# EAGLE board AugmentedStethoscope_vFinal (EAGLE 8.7.0)
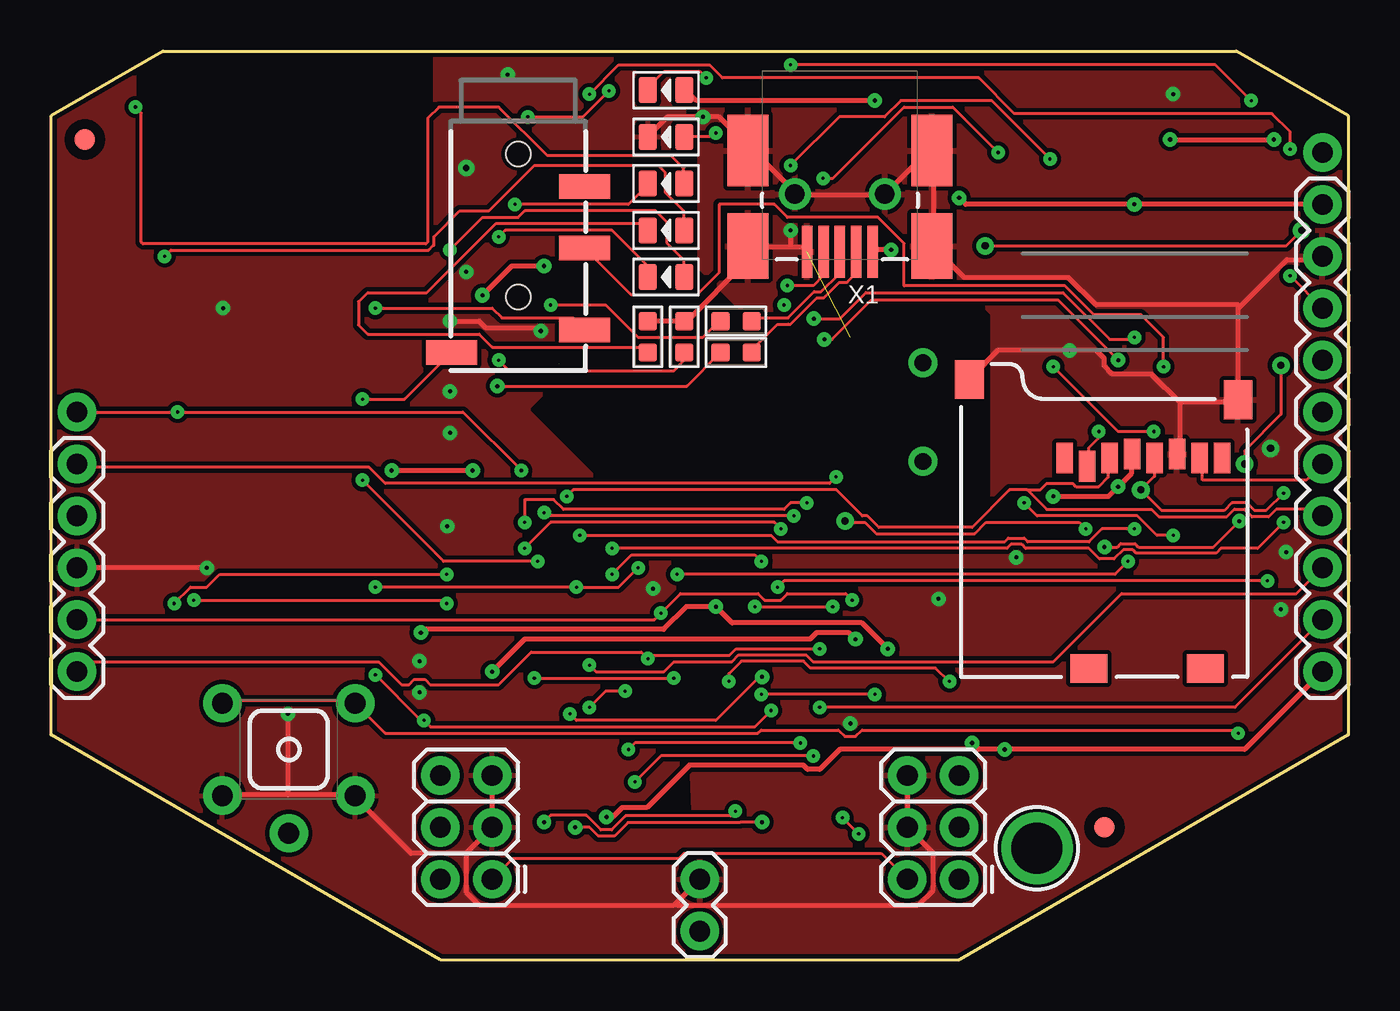
[diagram p0: board, top side]
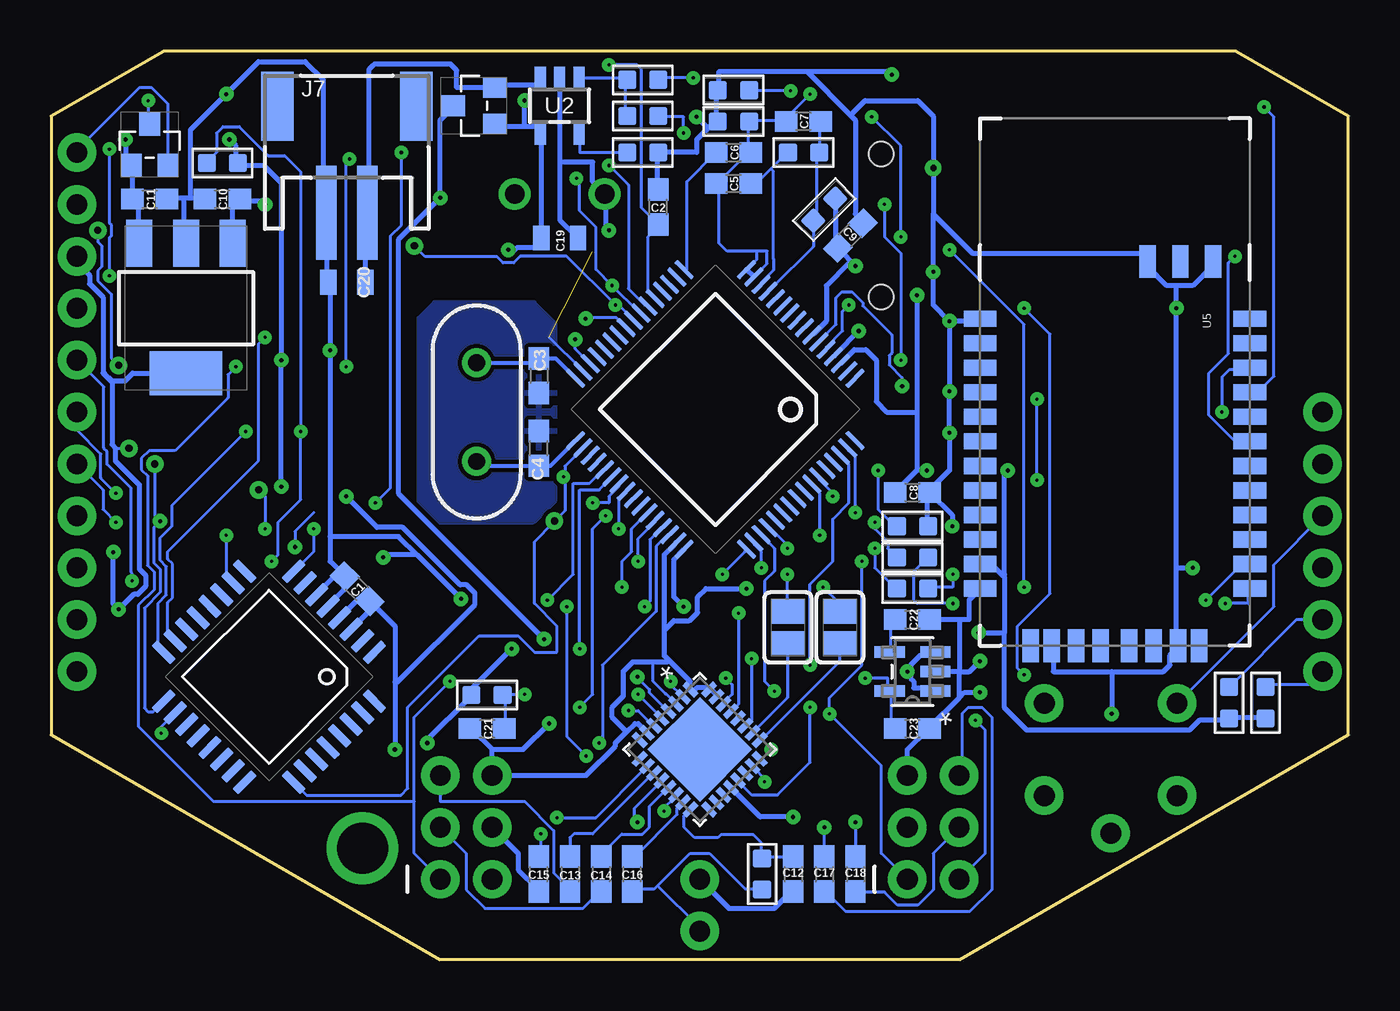
[diagram p1: board, bottom side, seen from below]

Size 63.5 x 44.45 mm. Coordinates in mm from the lower left corner, seen from the top.
Outline: 5.5,44.45 58,44.45 63.5,41.28 63.5,11 44.45,0 19.05,0 0,11 0,41.28 5.5,44.45
Copper layers (1*16): Top 0.035mm / dielectric 1.5mm / Bottom 0.035mm
Design rules "SparkFun *": minimum track width 6mil, minimum drill 6mil, track to track 6mil, track to pad 6mil, pad to pad 6mil, via to via 6mil, smd to smd 4mil, copper to edge 8mil, drill to drill 8mil, minimum pad ring 12mil, minimum via ring 10mil, stop-mask expansion 5mil, vias tented up to drill 25mil, thermal gap 8mil
Net classes: 0 default: width 0.152 mm, drill 0.152 mm, clearance 0.152 mm; 1 power: width 0.254 mm, drill 0.203 mm, clearance 0.203 mm
tRestrict: area 4.6,35.2 to 18.3,41.5
bRestrict: area 48.3,9.3 to 57.4,18.4; area 4.6,35.2 to 18.3,41.5; area 23.9,19.7 to 38.1,34.2; area 53.6,30.1 to 60.2,33.6

## Footprints (pad centres in the part's own frame; a part is rotated, then mirrored left to right if it is on the bottom)
0603 = smd 1.1 x 1: 1 -0.85,0; 2 0.85,0
0805 = smd 0.8 x 1.2: 1 -0.9,0; 2 0.9,0
FIDUCIAL_1MM = smd 1 x 1: 1 0,0
HC49US = drill 0.813: 1 -2.413,0; 2 2.413,0
1X05 = drill 1.016 pad 1.88: 1 0,0; 2 2.54,0; 3 5.08,0; 4 7.62,0; 5 10.16,0
2X3 = drill 1.016 pad 1.88: 1 0,0; 2 0,2.54; 3 2.54,0; 4 2.54,2.54; 5 5.08,0; 6 5.08,2.54
1X10 = drill 1.016 pad 1.88: 1 0,0; 2 2.54,0; 3 5.08,0; 4 7.62,0; 5 10.16,0; 6 12.7,0; 7 15.24,0; 8 17.78,0; 9 20.32,0; 10 22.86,0
1X02 = drill 1.016 pad 1.88: 1 0,0; 2 2.54,0
AUDIO_JACK_3.5MM_TRRS_SMD_RA = smd 1.2 x 2.5: EARTH 11.3,-3.25; RING1 6.2,3.25; RING2 3.2,3.25; TIP 10.2,3.25 | hole 1.2: 1.6,0; 8.6,0
JSTPH2 = smd 1 x 4.6: 1 -1,-3.7; 2 1,-3.7 | smd 1.6 x 3.4: NC1 -3.4,1.5; NC2 3.4,1.5
1X01NS = drill 1.016 pad 1.88: 1 0,0
LQFP32-08 = smd 1.3 x 0.4: 1 -4.493,2.8; 2 -4.493,2; 3 -4.493,1.2; 4 -4.493,0.4; 5 -4.493,-0.4; 6 -4.493,-1.2; 7 -4.493,-2; 8 -4.493,-2.8; 17 4.493,-2.8; 18 4.493,-2; 19 4.493,-1.2; 20 4.493,-0.4; 21 4.493,0.4; 22 4.493,1.2; 23 4.493,2; 24 4.493,2.8 | smd 0.4 x 1.3: 9 -2.8,-4.493; 10 -2,-4.493; 11 -1.2,-4.493; 12 -0.4,-4.493; 13 0.4,-4.493; 14 1.2,-4.493; 15 2,-4.493; 16 2.8,-4.493; 25 2.8,4.493; 26 2,4.493; 27 1.2,4.493; 28 0.4,4.493; 29 -0.4,4.493; 30 -1.2,4.493; 31 -2,4.493; 32 -2.8,4.493
LQFP64-05 = smd 1.2 x 0.25: 1 -5.915,3.759; 2 -5.915,3.251; 3 -5.915,2.743; 4 -5.915,2.261; 5 -5.915,1.753; 6 -5.915,1.245; 7 -5.915,0.762; 8 -5.915,0.254; 9 -5.915,-0.254; 10 -5.915,-0.762; 11 -5.915,-1.245; 12 -5.915,-1.753; 13 -5.915,-2.261; 14 -5.915,-2.743; 15 -5.915,-3.251; 16 -5.915,-3.759; 33 5.915,-3.759; 34 5.915,-3.251; 35 5.915,-2.743; 36 5.915,-2.261; 37 5.915,-1.753; 38 5.915,-1.245; 39 5.915,-0.762; 40 5.915,-0.254; 41 5.915,0.254; 42 5.915,0.762; 43 5.915,1.245; 44 5.915,1.753; 45 5.915,2.261; 46 5.915,2.743; 47 5.915,3.251; 48 5.915,3.759 | smd 0.25 x 1.2: 17 -3.759,-5.915; 18 -3.251,-5.915; 19 -2.743,-5.915; 20 -2.261,-5.915; 21 -1.753,-5.915; 22 -1.245,-5.915; 23 -0.762,-5.915; 24 -0.254,-5.915; 25 0.254,-5.915; 26 0.762,-5.915; 27 1.245,-5.915; 28 1.753,-5.915; 29 2.261,-5.915; 30 2.743,-5.915; 31 3.251,-5.915; 32 3.759,-5.915; 49 3.759,5.915; 50 3.251,5.915; 51 2.743,5.915; 52 2.261,5.915; 53 1.753,5.915; 54 1.245,5.915; 55 0.762,5.915; 56 0.254,5.915; 57 -0.254,5.915; 58 -0.762,5.915; 59 -1.245,5.915; 60 -1.753,5.915; 61 -2.261,5.915; 62 -2.743,5.915; 63 -3.251,5.915; 64 -3.759,5.915
LED-0805 = smd 0.889 x 1.27: + -0.889,0; - 0.889,0
R0603 = smd 0.889 x 0.889: 1 0,0.762; 2 0,-0.762
SOT-23 = smd 1.016 x 1.143: 1 -0.889,-1.016; 2 0.889,-1.016; 3 0,1.016
L0603 = smd 0.889 x 0.889: 1 -0.762,0; 2 0.762,0
ALPS_SKHH = drill 1.016 pad 1.88: 1 -3.251,2.261; 2 3.251,2.261; 3 -3.251,-2.261; 4 3.251,-2.261; 5 0,-4.1
SOLDERJUMPER = smd 1.168 x 1.6: 1 -0.762,0; 2 0.762,0
SOT-223 = smd 1.27 x 2.286: 1 -2.286,-3.175; 2 0,-3.175; 3 2.286,-3.175 | smd 3.556 x 2.159: PAD 0,3.175
MICRO-SD-SOCKET-PP = smd 0.8 x 1.5: 1 -8.94,10.7; 2 -7.84,10.3; 3 -6.74,10.7; 4 -5.64,10.9; 5 -4.54,10.7; 6 -3.44,10.9; 7 -2.34,10.7; 8 -1.24,10.7 | smd 1.8 x 1.4: CD1 -7.75,0.4; CD2 -2.05,0.4 | smd 1.4 x 1.9: GND1 -13.6,14.55; GND2 -0.45,13.55
SOT23-5 = smd 0.55 x 1.2: 1 -0.95,-1.3; 2 0,-1.3; 3 0.95,-1.3; 4 0.95,1.3; 5 -0.95,1.3
QFN32 = smd 0.305 x 0.813: 1 1.75,2.4; 2 1.25,2.4; 3 0.75,2.4; 4 0.25,2.4; 5 -0.25,2.4; 6 -0.75,2.4; 7 -1.25,2.4; 8 -1.75,2.4; 17 -1.75,-2.4; 18 -1.25,-2.4; 19 -0.75,-2.4; 20 -0.25,-2.4; 21 0.25,-2.4; 22 0.75,-2.4; 23 1.25,-2.4; 24 1.75,-2.4 | smd 0.813 x 0.305: 9 -2.4,1.75; 10 -2.4,1.25; 11 -2.4,0.75; 12 -2.4,0.25; 13 -2.4,-0.25; 14 -2.4,-0.75; 15 -2.4,-1.25; 16 -2.4,-1.75; 25 2.4,-1.75; 26 2.4,-1.25; 27 2.4,-0.75; 28 2.4,-0.25; 29 2.4,0.25; 30 2.4,0.75; 31 2.4,1.25; 32 2.4,1.75 | smd 3.607 x 3.607: HTAB 0,0
DBV5 = smd 1.473 x 0.559: 1 -1.118,0.95; 2 -1.118,0; 3 -1.118,-0.95; 4 1.118,-0.95; 5 1.118,0.95
RN41 = smd 0.8 x 1.6: 1 -6.6,-6.6; 2 -5.4,-6.6; 3 -4.2,-6.6; 4 -3,-6.6; 5 -1.8,-6.6; 6 -0.6,-6.6; 7 0.6,-6.6; 8 1.8,-6.6; 9 3,-6.6; 10 4.2,-6.6; 11 5.4,-6.6; 12 6.6,-6.6; 13 6.6,6.6; 14 5.4,6.6; 15 4.2,6.6; 16 3,6.6; 17 1.8,6.6; 18 0.6,6.6; 19 -0.6,6.6; 20 -1.8,6.6; 21 -3,6.6; 22 -4.2,6.6; 23 -5.4,6.6; 24 -6.6,6.6 | smd 1.6 x 0.8: 25 -9.4,4.8; 26 -9.4,3.2; 27 -9.4,1.6; 28 9.4,3.1; 29 9.4,-3.1; 30 9.4,-4.122; 31 9.4,-1.9; 32 9.4,-0.7; 33 9.4,0.7; 34 9.4,1.9; 35 9.4,4.122
MOUNTINGHOLE_2.5_PLATED = drill 2.5 pad 3.2: P$1 0,0
MOLEX_SD-67503-010 = smd 2.54 x 0.508: 1 2.819,1.6; 2 2.819,0.8; 3 2.819,0; 4 2.819,-0.8; 5 2.819,-1.6 | smd 3.5 x 2: P$1 -2.121,-4.5; P$2 -2.121,4.5 | smd 3.2 x 2: P$3 2.544,-4.5; P$4 2.544,4.5 | drill 0.95: P$5 0,2.2; P$6 0,-2.2

## Placement (x,y rotation side)
C1  0.1uF  [0603]  48.51,18.15 135 bottom
C2  0.1uF  [0603]  33.78,36.82 90 bottom
C3  22pF  [0603]  39.62,28.57 270 bottom
C4  22pF  [0603]  39.62,25.01 90 bottom
C5  0.1uF  [0603]  30.1,37.97 180 bottom
C6  0.1uF  [0603]  30.1,39.49 0 bottom
C7  2.2uF  [0603]  26.67,41.01 180 bottom
C8  0.1uF  [0603]  21.34,22.85 0 bottom
C9  0.1uF  [0603]  24.38,35.43 45 bottom
C10  0.1uF  [0603]  55.12,37.2 180 bottom
C11  2.2uF  [0603]  58.67,37.2 0 bottom
C12  2.2uF  [0603]  27.18,4.18 270 bottom
C13  2.2uF  [0603]  38.1,4.18 270 bottom
C14  2.2uF  [0603]  36.58,4.18 270 bottom
C15  0.15uF  [0603]  39.62,4.18 90 bottom
C16  0.1uF  [0603]  35.05,4.18 90 bottom
C17  2.2uF  [0603]  25.65,4.18 270 bottom
C18  2.2uF  [0603]  24.13,4.18 270 bottom
C19  10uF  [0805]  38.61,35.3 180 bottom
C20  10uF  [0805]  49.02,33.14 0 bottom
C21  2.2uF  [0603]  42.16,11.3 180 bottom
C22  2.2uF  [0603]  21.34,16.63 0 bottom
C23  2.2uF  [0603]  21.34,11.3 180 bottom
FID1  FIDUCIAL""  [FIDUCIAL_1MM]  1.65,40.12 0 top
FID2  FIDUCIAL""  [FIDUCIAL_1MM]  51.56,6.47 0 top
G1  16MHz  [HC49US]  42.67,26.79 270 bottom
J1  [1X05]  1.27,14.09 90 top
J2  FEMALE 2x3  [2X3]  21.59,3.93 90 top
J3  FEMALE 2x3  [2X3]  44.45,3.93 90 top
J4  [1X10]  62.23,14.09 90 top
J5  [1X02]  31.75,3.93 270 top
J6  AUDIO_JACK_TRRSSMD_RA  [AUDIO_JACK_3.5MM_TRRS_SMD_RA]  22.86,41.01 270 top
J7  JSTPH  [JSTPH2]  49.02,40.25 0 bottom
JP1  M01SMDNS  [1X01NS]  1.27,26.79 90 top
JP2  M01SMDNS  [1X01NS]  62.23,39.49 0 bottom
K1  MKL04Z32VLC4  [LQFP32-08]  52.83,13.84 225 bottom
K2  MK20DX256VLH7  [LQFP64-05]  30.99,26.92 225 bottom
P1  BLUE  [LED-0805]  30.1,33.39 180 top
P2  BLUE  [LED-0805]  30.1,37.97 180 top
P3  BLUE  [LED-0805]  30.1,35.68 180 top
P4  GREEN  [LED-0805]  30.1,40.25 180 top
P5  RED  [LED-0805]  30.1,42.54 180 top
R1  470  [R0603]  30.1,42.54 90 bottom
R2  470  [R0603]  30.99,30.47 0 top
R3  470  [R0603]  29.21,30.47 0 top
R4  10K  [R0603]  21.34,21.2 270 bottom
R5  [SOT-23]  58.67,39.87 0 bottom
R6  10K  [R0603]  21.34,19.68 90 bottom
R7  33  [R0603]  33.53,31.23 270 top
R8  33  [R0603]  33.53,29.71 270 top
R9  10K  [R0603]  21.34,18.15 90 bottom
R10  [L0603]  30.1,41.01 0 bottom
R11  470  [R0603]  26.67,39.49 270 bottom
R12  [L0603]  25.65,36.7 45 bottom
R13  2.2K  [R0603]  28.7,4.18 180 bottom
R14  10K  [R0603]  55.12,38.98 90 bottom
R15  470  [R0603]  34.54,41.27 270 bottom
R16  2.2K  [R0603]  34.54,39.49 270 bottom
R17  470  [R0603]  34.54,43.05 270 bottom
R18  [SOT-23]  42.8,41.78 90 bottom
R19  10K  [R0603]  4.06,12.57 0 bottom
R20  [L0603]  42.16,12.95 180 bottom
R21  10K  [R0603]  5.84,12.57 0 bottom
S1  [ALPS_SKHH]  11.63,10.28 0 top
SJ1  [SOLDERJUMPER]  27.43,16.25 90 bottom
SJ2  [SOLDERJUMPER]  24.89,16.25 90 bottom
T1  MCP1825S  [SOT-223]  56.9,31.87 180 bottom
U1  microSD  [MICRO-SD-SOCKET-PP]  58.55,13.84 0 top
U2  MCP73831T-2ACI/OT  [SOT23-5]  38.61,41.78 180 bottom
U3  SGTL5000XNAA3R2  [QFN32]  31.75,10.28 45 bottom
U4  TPS79318DBVR  [DBV5]  21.34,14.09 180 bottom
U5  BLUETOOTH-RN41  [RN41]  11.43,24.76 270 bottom
U$1  MOUNTINGHOLE2.5  [MOUNTINGHOLE_2.5_PLATED]  48.26,5.45 0 top
X1  MINI-USB  [MOLEX_SD-67503-010]  38.61,37.46 270 top

## Library data of the parts
C1 C2 C5 C6 C8-C10 C15 C16 = SparkFun-Capacitors; PROD_ID: CAP-08604
C3 C4 = SparkFun-Capacitors; PROD_ID: CAP-07876
C7 C11-C14 C17 C18 C21-C23 = SparkFun-Capacitors; PROD_ID: CAP-07888
C19 C20 = SparkFun-Capacitors; PROD_ID: CAP-11330
FID1 FID2 U$1 = microbuilder; BOM: EXCLUDE
G1 = t32_ref; DESC: 16MHz / 18pF / 10ppm; MF: ABRACON; MPN: ABL-16.000MHz-B1U; OC_MOUSER: 815-ABL-16-B1U; PACKAGE: HC-49US; TYPE: Crystal
J1 J5 = SparkFun-Connectors
J2 J3 = SparkFun-Connectors; PROD_ID: CONN-11566
J4 = SparkFun-Connectors; PROD_ID: CONN-11563
J6 = SparkFun-Connectors; PROD_ID: CONN-10676; SF_ID: PRT-12639
J7 U2 = microbuilder
JP1 JP2 U1 = SparkFun
K1 = t32_ref; DESC: MKL04Z32VLC4 (preprogrammed); MF: PJRC; MPN: IC_MKL04Z32_TQFP32; PACKAGE: LQFP-32; TYPE: Microcontroller
K2 = t32_ref; DESC: MK20DX256VLH7; MF: NXP; MPN: MK20DX256VLH7; OC_MOUSER: 841-MK20DX256VLH7; PACKAGE: LQFP-64; TYPE: Microcontroller
P1-P5 = t32_ref; DESC: orange; MF: ROHM Semiconductor; MPN: SML-211DTT86; OC_MOUSER: 755-SML-211DTT86; PACKAGE: 0805; TYPE: LED
R1-R4 R11 R13 R14 R16 R19 R21 = t32_ref; DESC: 470R / 1 % / 0.1 W; MF: Vishay; MPN: CRCW0603470RFKEA; OC_MOUSER: 71-CRCW0603-470-E3; PACKAGE: 0603; TYPE: Resistor
R5 R18 = t32_ref; DESC: Dual Schottky, common cat; MF: NXP Semiconductors; MPN: BAT54C,215; OC_MOUSER: 771-BAT54C-T/R; PACKAGE: SOT-23; TYPE: Diode
R6-R9 R15 R17 = t32_ref; DESC: 33R / 1% / 0.25 W; MF: Panasonic; MPN: ERJ-PA3F33R0V; OC_MOUSER: 667-ERJ-PA3F33R0V; PACKAGE: 0603; TYPE: Resistor
R10 R12 R20 = t32_ref; DESC: 600R / 100MHz; MF: Murata Electronics; MPN: BLM18AG601SN1D; OC_MOUSER: 81-BLM11A601S; PACKAGE: 0603; TYPE: Ferrite
S1 = t32_ref; DESC: SPST; MF: ALPS; MPN: SKHHPKA010; OC_MOUSER: 688-SKHHPK; PACKAGE: 6x6x5 MM; TYPE: Tactile switch
SJ1 SJ2 = t32_ref
T1 = t32_ref; DESC: 3.3V 500mA; MF: Microchip Technology; MPN: MCP1825S-3302E/DB; OC_MOUSER: 579-MCP1825S-3302EDB; PACKAGE: SOT-223-3; TYPE: Voltage regulator
U3 = pd3d_augmentedstethoscope; MANUFACTURER_PART_NUMBER: SGTL5000XNAA3R2; VENDOR: Freescale
U4 = pd3d_augmentedstethoscope; MANUFACTURER_PART_NUMBER: TPS79318DBVR; VENDOR: Texas Instruments
U5 = ScratchPad
X1 = t32_ref; DESC: MINI USB; MF: MOLEX; MPN: 0675031020; OC_MOUSER: 538-67503-1020; TYPE: Mini USB

## Nets
0/RX1: K2.39 R6.1
1/TX1: K2.40 R9.1
2: K2.57
3.3V [power]: C1.1 C8.1 C9.1 C11.1 J4.1 K1.3 K1.4 K2.3 K2.7 K2.30 K2.48 R5.1 R12.2 R14.2 R19.2 R20.2 R21.2 T1.3 U1.4 U3.20 U5.11
3/PWM: K2.28
4/PWM: K2.29
5/PWM: K2.64
6/PWM: K2.61
7/SPI_MOSI: J4.4 K2.59 U1.3
8: K2.60
9: K2.46 U3.24
10/SPI_CS: K2.49 R14.1 U1.2
11: K2.51 U3.21
12/SPI_MISO: J4.5 K2.52 U1.7
13/LED: K2.50 P1.+ SJ2.2
14/SPI_SCK: J4.6 K2.58 U1.5
15/A1: J4.7 K2.43
16/A2: K2.35
17/A3: K2.36
18/A4/SDA: J1.1 K2.38 R19.1 U3.27
19/A5/SCL: J1.2 K2.37 R21.1 U3.29
20/A6/SPI_CS: J4.3 K2.62
21/A7/SPI_CS: J4.2 K2.63
22/A8: K2.44 SJ1.2
23/A9: K2.45 U3.23
24: K2.27
25/PWM: K2.42
26/A15: K2.2
27/A16: K2.54
28/A17: K2.53
29/A18: K2.55
30/A19: K2.56
31/A20: K2.1
32/TOUCH: K2.41
33/TOUCH: K2.26
A12: K2.11
A13: K2.12
AGND: C5.2 C6.2 C7.2 J4.8 K2.15 K2.16 R10.2
D3: P2.- R2.2
D4: P3.- R3.2
D+: R7.1 X1.3
D-: R8.1 X1.2
DAC/A14: K2.18
DETECT: U1.CD2
GND [power]: C1.2 C2.2 C3.2 C4.2 C8.2 C9.2 C10.2 C11.2 C12.2 C15.1 C19.1 C20.1 C21.2 C22.2 C23.1 J1.3 J2.3 J2.5 J3.4 J3.6 J4.9 J5.1 J7.1 K1.5 K1.6 K2.4 K2.31 K2.47 P4.- R1.1 R2.1 R3.1 R4.1 R10.1 R16.1 S1.3 S1.4 T1.2 T1.PAD U1.6 U1.GND1 U1.GND2 U2.2 U3.1 U3.3 U3.7 U3.31 U3.32 U4.2 U5.1 U5.12 U5.25 U5.27 U5.28 U5.29 X1.5 X1.P$1 X1.P$2 X1.P$3 X1.P$4 X1.P$5 X1.P$6
HPGND: J2.1 J3.2 J6.EARTH U3.4
HPL: J2.2 J6.TIP U3.6
HPR: J3.1 J6.RING1 U3.2
ID: K1.10 K2.23 X1.4
LIL: C18.2 J2.4
LIL_ISO: C18.1 U3.14
LIR: C14.2 J3.3
LIR_ISO: C14.1 U3.13
LOL: C17.2 J2.6
LOL_ISO: C17.1 U3.12
LOR: C13.2 J3.5
LOR_ISO: C13.1 U3.11
MIC: C16.1 J5.2 R13.1
MIC_BIAS: C12.1 R13.2 U3.16
N$1: C20.2 J7.2 R18.2 U2.3
N$2: K1.16 K2.22
N$3: K1.17 K2.24
N$4: C15.2 U3.10
N$5: C3.1 G1.1 K2.32
N$6: C4.1 G1.2 K2.33
N$7: C5.1 K2.14 R11.2
N$8: C22.1 U4.4
N$9: SJ1.1 U3.26
N$10: K2.5 R7.2
N$11: C6.1 K2.17
N$12: C23.2 U3.30 U4.5
N$13: SJ2.1 U3.25
N$14: K2.6 R8.2
N$15: C16.2 U3.15
N$16: P3.+ U5.19
N$17: C7.1 K2.13 R11.1 R12.1
N$52: P1.- R1.2
N$68: C2.1 K2.21 R5.3
N$70: K1.15 K2.25
N$71: P5.- R17.1
N$72: R15.2 R17.2 U2.1
N$73: P2.+ U5.21
N$75: R16.2 U2.5
N$76: P4.+ R15.1
N$79: C21.1 R20.1 U3.5
PIO4: JP1.1 R4.2 U5.22
PROG: J1.4 K1.18 S1.1 S1.2
RESET: J1.5 K1.8 K1.25 K2.34
SMIRF_CTS: U5.16
SMIRF_RTS: U5.15
SMIRF_RX: R9.2 U5.13
SMIRF_TX: R6.2 U5.14
V_USB [power]: C19.2 P5.+ R18.1 U2.4 X1.1
VIN [power]: C10.1 J4.10 R18.3 T1.1 U4.1 U4.3
VRTC: JP2.1 R5.2

## Tracks (layer width: path | path; a pad name or v marks a point on that pad's centre or on a via)
0/RX1  (via drill 0.15)
  Top 0.152: v23.18,21.39 23.18,22.5 24.61,22.5 25.08,22.03 35.88,22.03 36.2,22.34 v36.99,22.34
  Bottom 0.152: R6.1 22.54,20.12 22.54,20.44 23.18,21.07 v23.18,21.39 | v36.99,22.34 36.2,22.34 36.2,22.66 35.72,23.14 K2.39
1/TX1  (via drill 0.15)
  Top 0.152: v23.18,20.12 24.45,21.39 35.4,21.39 v35.72,21.07
  Bottom 0.152: v23.18,20.12 23.18,19.17 22.23,18.22 R9.1 | v35.72,21.07 35.72,22.5 35.4,22.82 K2.40
3.3V  (via drill 0.2)  (1 unrouted)
  Top 0.152: v52.23,29.33 49.28,32.28 40.16,32.28 38.23,30.35 v37.85,30.35
  Top 0.254: v21.11,32.5 22.54,33.93 v24.13,33.93 | v16.67,23.93 v20.64,23.93 | U1.4 52.86,24.73 52.86,23.77 v52.23,23.14 51.75,22.66 v49.05,22.66 | v54.77,40.12 v59.85,40.12 | v45.09,10.6 45.4,10.28 v46.67,10.28 | v46.67,10.28 58.42,10.28 J4.1 | v40.96,15.2 39.69,16.47 33.34,16.47 v32.54,17.26 31.1,17.26 29.98,16.15 18.26,16.15 v18.1,15.99 | v46.67,10.28 38.61,10.28 37.63,9.3 37.03,9.3 36.82,9.52 31.24,9.52 29.16,7.43 27.96,7.43 27.5,6.98 v27.18,6.98
  Bottom 0.152: K2.30 37.85,29.9 v37.85,30.35
  Bottom 0.254: R12.2 25.08,37.11 25.08,34.89 C9.1 24.92,34.73 v24.13,33.93 24.45,34.09 25.56,32.98 25.56,31.23 26.19,30.6 K2.7 | 21.11,23.93 22.07,22.98 C8.1 | v21.11,32.5 21.11,26.79 | 21.11,26.79 21.11,23.93 | R19.2 4.13,11.87 5.71,11.87 R21.2 5.87,11.71 7.3,11.71 7.78,11.23 15.75,11.23 16.83,12.31 16.83,15.99 | 16.83,15.99 16.83,18.69 16.91,18.77 | 16.91,18.77 17.46,19.33 17.94,19.33 U5.11 | v20.64,23.93 21.11,23.93 | v16.67,23.93 16.83,23.77 16.83,18.85 16.91,18.77 | T1.3 59.21,35.04 59.21,36.95 59.37,37.11 C11.1 59.53,37.27 59.53,38.85 R5.1 59.69,38.85 59.85,39.01 v59.85,40.12 | v52.23,23.14 v52.23,29.33 52.23,38 53.09,38.85 54.29,38.85 R14.2 54.45,39.01 54.45,39.81 v54.77,40.12 | 47.94,17.42 47.93,17.49 | 47.93,17.49 C1.1 | 48.74,16.31 K1.3 47.93,17.04 47.93,17.49 | v45.09,10.6 45.09,10.76 43.02,12.82 R20.2 42.86,12.98 42.86,13.3 v40.96,15.2 | 47.94,21.55 v49.05,22.66 47.54,21.15 46.29,21.15 43.47,18.33 43.15,18.33 42.75,17.93 42.75,17.36 46.53,13.58 46.67,13.58 | C1.1 47.94,17.58 47.94,17.65 48.46,17.65 K1.4 | v18.1,15.99 16.83,15.99 | v27.18,6.98 28.8,6.98 U3.20 | 21.11,26.79 22.61,26.79 23.11,27.3 23.11,29.33 23.62,29.84 24.19,29.84 K2.3 | C1.1 46.67,16.31 46.67,13.58 | 46.67,13.58 v46.67,10.28 | K2.48 33.02,19.57 33.02,17.74 v32.54,17.26
7/SPI_MOSI  (via drill 0.15)
  Top 0.152: v25.24,22.66 25.56,22.98 38.43,22.98 39.7,21.71 39.95,21.71 40.51,21.15 45.08,21.15 46.91,22.98 47.78,22.98 | U1.3 51.75,24.41 51.75,23.61 51.28,23.14 50.16,23.14 50.01,23.3 48.74,23.3 48.42,22.98 47.78,22.98 | 47.78,22.98 48.74,22.03 53.86,22.03 54.23,21.66 57.55,21.66 57.92,22.04 58.41,22.04 58.79,21.66 59.59,21.66 59.97,22.04 61.9,22.04 J4.4
  Bottom 0.152: v25.24,22.66 25.24,22.82 25.88,23.46 K2.59
9  (via drill 0.15)
  Top 0.152: v28.26,10.28 28.57,10.6 v36.67,10.6
  Bottom 0.152: v28.26,10.28 28.73,9.8 U3.24 | v36.67,10.6 36.51,10.76 36.51,14.41 33.88,17.04 33.88,20.21 33.34,20.76 K2.46
10/SPI_CS  (via drill 0.15)
  Top 0.152: v51.28,25.84 51.28,25.52 50.8,25.04 50.8,24.25 U1.2 | v30.64,18.85 52.07,18.85 v52.7,19.49
  Bottom 0.152: R14.1 55.88,39.01 55.4,39.49 55.4,40.44 55.09,40.76 54.29,40.76 52.86,39.33 52.07,39.33 51.28,38.54 v51.28,25.84 51.28,22.5 52.39,21.39 52.39,19.8 v52.7,19.49 | v30.64,18.85 29.53,19.96 K2.49
11  (via drill 0.15)
  Top 0.152: v26.35,12.34 27.15,13.14 v28.1,13.14
  Bottom 0.152: v28.1,13.14 28.57,13.61 28.57,18.53 28.1,19.01 28.1,20.12 28.73,20.76 K2.51 | U3.21 29.84,8.69 29.21,8.06 27.94,8.06 26.35,9.64 v26.35,12.34
12/SPI_MISO  (via drill 0.15)
  Top 0.152: v60.33,21.39 59.05,20.12 57.26,20.12 57.02,19.88 53.1,19.88 52.94,20.05 52.47,20.05 52.03,19.6 51.32,19.6 50.8,20.12 47.7,20.12 47.51,20.31 46.98,20.31 46.79,20.12 v27.46,20.12 | J4.5 61.44,23.46 56.36,23.46 56.36,24.41 U1.7
  Bottom 0.152: v27.46,20.12 27.46,20.28 28.26,21.07 K2.52 | v60.33,21.39 60.96,22.03 60.96,22.98 J4.5
13/LED  (via drill 0.15)
  Top 0.152: v28.73,19.17 27.78,18.22 v25.72,18.22 v15.88,18.22 | v19.53,34.73 21.11,36.31 22.86,36.31 23.18,36.63 29.59,36.63 30.13,36.1 30.13,35.08 30.96,34.25 30.96,33.46 P1.+
  Bottom 0.152: v28.73,19.17 28.73,19.96 29.05,20.28 K2.50 | v25.72,18.22 24.92,17.42 24.92,17.11 SJ2.2 | v19.53,34.73 15.88,31.08 v15.88,18.22
14/SPI_SCK  (via drill 0.15, 0.35)
  Top 0.152: v25.88,20.76 35.24,20.76 35.56,20.44 46.68,20.44 46.86,20.62 47.63,20.62 47.81,20.44 50.8,20.44 51.44,21.07 v53.02,21.07 | U1.5 54.01,23.65 v53.34,22.98 54.36,21.96 57.42,21.96 57.8,22.34 58.53,22.34 58.91,21.96 59.47,21.96 v60.33,22.82
  Bottom 0.152: v25.88,20.76 25.88,22.82 26.19,23.14 K2.58 | v60.33,22.82 61.06,23.56 61.06,24.73 62.23,25.9 J4.6 | v53.34,22.98 53.02,22.66 v53.02,21.07
15/A1  (via drill 0.15)
  Top 0.152: v35.56,18.22 35.88,18.53 v59.53,18.53
  Bottom 0.152: v35.56,18.22 35.56,19.49 35.08,19.96 35.08,21.07 34.45,21.71 K2.43 | v59.53,18.53 59.53,18.89 59.59,18.95 59.59,23.07 60.76,24.23 60.76,24.86 60.92,25.02 60.92,28.02 J4.7
18/A4/SDA  (via drill 0.15)
  Top 0.152: 29.05,14.88 28.89,15.04 23.49,15.04 21.91,13.45 18.55,13.45 18.3,13.71 17.77,13.71 17.52,13.45 17.14,13.45 16.03,14.57 1.75,14.57 J1.1 | 29.05,14.88 v29.21,14.72 | v37.62,15.2 37.09,15.2 37.08,15.21 33.53,15.21 33.2,14.88 29.05,14.88
  Bottom 0.152: v29.21,14.72 29.21,11.71 29.37,11.55 U3.27 | J1.1 1.27,13.45 3.97,13.45 R19.1 | v37.62,15.2 37.62,22.98 36.67,22.98 36.2,23.46 K2.38
19/A5/SCL  (via drill 0.15)
  Top 0.152: J1.2 29.53,16.63 v29.84,16.95 30.8,17.9 34.61,17.9 34.92,17.58 35.72,17.58 36.04,17.9 38.89,17.9 v39.21,17.58
  Bottom 0.152: v29.84,16.95 29.84,12.5 30.16,12.18 U3.29 | R21.1 2.54,16.63 J1.2 | v39.21,17.58 37.94,18.85 37.94,23.3 37.15,23.3 36.51,23.93 K2.37
20/A6/SPI_CS  (via drill 0.15)
  Top 0.152: v26.35,14.41 26.67,14.09 30,14.09 30.48,14.57 33.32,14.57 33.65,14.9 36.96,14.9 37.29,14.57 49.05,14.57 52.39,17.9 60.96,17.9 J4.3
  Bottom 0.152: v26.35,14.41 26.35,18.38 25.24,19.49 25.24,21.55 24.45,22.34 24.45,24.25 24.77,24.57 K2.62
21/A7/SPI_CS  (via drill 0.15)
  Top 0.152: v24.13,21.87 24.29,21.71 v36.35,21.71 | v37.62,12.34 57.94,12.34 J4.2
  Bottom 0.152: v24.13,21.87 24.13,24.57 24.45,24.88 K2.63 | v36.35,21.71 36.99,21.07 36.99,12.98 v37.62,12.34
22/A8  (via drill 0.15)
  Top 0.152: v34.77,19.49 34.45,19.8 28.42,19.8 v27.46,18.85
  Bottom 0.152: v34.77,19.49 34.77,20.6 33.97,21.39 K2.44 | v27.46,18.85 27.46,17.11 SJ1.2
23/A9  (via drill 0.15)
  Top 0.152: v28.57,8.69 29.84,9.96 v37.31,9.96 | v34.45,17.26 v38.26,17.26
  Bottom 0.152: v28.57,8.69 28.57,8.85 29.05,9.33 U3.23 | v37.31,9.96 38.26,10.91 v38.26,17.26 | K2.45 33.66,21.07 34.19,20.54 34.19,17.52 v34.45,17.26
AGND  (via drill 0.15)
  Top 0.152: v60.64,33.46 J4.8 | v26.35,42.35 27.78,43.78 32.23,43.78 32.86,43.14 45.4,43.14 47.15,41.39 59.75,41.39 60.64,40.51 v60.64,39.65
  Bottom 0.152: 29.37,33.77 K2.16 28.96,34.26 28.96,34.66 | 29.37,39.49 29.37,40.92 R10.2 29.21,41.08 27.62,41.08 C7.2 27.46,41.08 27.46,41.24 v26.35,42.35 | 29.37,39.49 30.8,38.06 C5.2 30.8,37.9 30.8,35.04 30.42,34.66 28.96,34.66 | 29.37,39.49 C6.2 | K2.15 28.45,34.05 28.45,34.66 28.96,34.66 | v60.64,39.65 60.64,36.04 60.56,35.95 60.56,35.41 60.64,35.32 v60.64,33.46
  Bottom 0.254: K2.15 K2.16 | K2.16
D3  (via drill 0.15)
  Top 0.152: v22.7,36.95 28.26,36.95 29.21,37.9 P2.- | v21.91,29.33 22.41,28.82 30.48,28.82 30.99,29.33 R2.2
  Bottom 0.152: v21.91,29.33 21.91,34.57 22.7,35.36 v22.7,36.95
D4
  Top 0.152: P3.- 28.89,36 21.75,36 18.38,32.63 15.49,32.63 15.05,32.19 15.05,31.04 15.49,30.6 20.95,30.6 21.59,29.96 29.05,29.96 29.21,29.81 R3.2
D+
  Top 0.152: R7.1 34.45,31.39 36.07,31.39 37.35,32.68 37.69,32.68 38.58,33.56 38.58,34.57 X1.3
D-
  Top 0.152: R8.1 34.29,29.81 35.56,31.08 36.07,31.08 36.08,31.09 36.19,31.09 37.48,32.37 37.82,32.37 38.59,33.14 38.96,33.14 39.37,33.55 39.37,34.57 X1.2
GND  (via drill 0.2, 0.3, 0.35)  (1 unrouted)
  Top 0.254: R3.1 R2.1 31.11,31.23 33.97,34.09 33.97,34.89 X1.P$3 34.13,34.89 36.2,34.89 | 36.2,34.89 36.83,34.89 36.99,34.73 X1.5 | P4.- 29.21,40.28 30.16,41.24 v31.91,41.24 32.7,41.24 33.97,39.97 33.97,39.65 X1.P$1 34.13,39.49 34.45,39.49 36.35,37.58 X1.P$6 36.51,37.43 40.8,37.43 X1.P$5 40.96,37.58 42.86,39.49 43.02,39.49 X1.P$2 43.18,39.49 43.18,35.04 X1.P$4 43.18,34.89 44.7,33.37 49.8,33.37 51.14,32.03 58.1,32.03 58.18,31.95 | v36.2,35.68 36.2,34.89 | 55.25,27.27 55.25,24.88 U1.6 | 55.25,27.27 57.94,27.27 U1.GND2 58.1,27.42 58.1,31.87 58.18,31.95 | U1.GND1 45.09,28.54 46.36,29.81 v49.85,29.81 51.14,29.81 51.55,29.4 51.55,29.05 51.95,28.65 53.86,28.65 55.25,27.27 | J4.9 62.07,34.25 60.48,34.25 58.18,31.95 | J3.6 J3.4 43.18,5.2 43.18,3.4 42.44,2.66 30.64,2.66 30.56,2.74 | 11.59,8.06 14.76,8.06 S1.4 14.92,7.9 17.62,5.2 20.32,5.2 | 11.59,8.06 8.41,8.06 S1.3 | J2.5 J2.3 20.32,5.2 | 30.56,2.74 30.48,2.66 20.95,2.66 20.32,3.29 20.32,5.2 | 30.56,2.74 J5.1 | v7.62,19.17 J1.3 | v23.97,30.76 23.81,30.92 21.27,30.92 20.95,31.23 v19.53,31.23 | v11.59,12.03 11.59,8.06
  Bottom 0.152: U3.3 33.41,13 33.43,13 34.04,13.61 34.04,14.57 | K2.31 39.12,30.45 | 39.12,30.45 | 60.35,25.03 59.71,25.03 v59.69,25.01
  Bottom 0.254: 56.99,37.27 57.78,37.27 C11.2 | 56.99,37.27 56.67,37.27 | 56.67,37.27 56.04,37.27 C10.2 | 56.99,37.27 56.99,35.04 T1.2 | 49.85,17.42 K1.5 49.15,18.08 49.15,18.79 | 49.15,18.79 49.85,19.49 49.85,20.69 | 49.15,18.79 C1.2 49.61,18.75 K1.6 | 49.85,20.69 v49.85,29.81 49.85,33.14 C20.1 50.01,33.14 50.01,36.47 J7.1 50.16,36.63 50.16,43.05 51.05,43.93 53.34,43.93 v54.93,42.35 56.67,40.6 56.67,37.27 | 37.78,35.2 C19.1 37.78,35.36 38.58,36.16 38.58,39.01 | 38.58,39.01 38.58,42.98 U2.2 | v36.2,35.68 36.35,35.84 36.35,37.43 X1.P$6 36.51,37.58 36.99,38.06 36.99,39.01 38.58,39.01 | J4.9 62.23,34.09 61.62,33.48 61.62,33.06 60.96,32.4 60.96,28.69 | J3.4 40.64,5.2 40.64,4.41 39.69,3.45 C15.1 | 31.27,13.3 30.96,12.98 U3.31 | 31.27,13.3 31.91,13.3 32.07,13.14 U3.1 32.23,13.3 32.23,13.61 33.26,14.65 | 31.27,13.3 U3.32 | K2.47 33.02,20.28 33.48,19.82 33.48,16.12 | 35.32,11.15 35.88,10.6 35.88,10.44 37.31,9.01 J3.6 41.91,10.28 | 35.32,11.15 34.92,11.55 34.77,11.55 34.45,11.23 U3.7 | 41.91,10.28 42.86,11.23 C21.2 | 35.32,11.15 36.04,11.87 36.04,12.34 35.48,12.9 35.48,14.12 35.05,14.55 35.05,14.57 34.04,14.57 33.34,14.57 33.26,14.65 | C12.2 27.3,3.29 28.1,2.5 30.32,2.5 J5.1 | 19.05,16.63 18.57,16.63 18.57,17.58 18.1,18.06 U5.12 | 19.05,16.63 C22.2 | 19.05,14.09 U4.2 | 19.05,16.63 19.05,14.09 | J2.5 21.59,10.28 20.64,11.23 C23.1 20.48,11.39 19.05,12.82 | 19.05,12.82 19.05,14.09 | 8.41,32.98 8.89,32.98 9.83,33.92 U5.27 9.84,34.25 10.16,34.57 18.41,34.57 20.32,36.47 | 8.41,32.98 7.62,32.98 6.63,33.97 U5.25 | 11.59,14.09 14.45,14.09 14.45,15.2 U5.29 | 11.59,14.09 9.05,14.09 8.73,14.41 8.73,14.88 8.41,15.2 U5.28 8.41,15.36 8.41,19.17
  Bottom 0.254: 8.41,19.17 v8.41,31.87 8.41,32.98 | 8.41,19.17 v7.62,19.17 | C2.2 33.81,37.74 33.81,39.49 R16.1 31.91,39.49 31.91,40.12 31.35,40.68 | 30.96,41.08 30.96,42.51 R1.1 30.8,42.66 30.8,43.46 26.51,43.46 | 26.51,43.46 24.37,41.32 | 24.37,41.32 24.13,41.08 24.13,36.47 23.81,36.16 C9.2 | 30.96,41.08 31.35,40.68 | 30.96,41.08 R10.1 | R4.1 20.64,21.23 20.64,22.82 C8.2 | v23.97,30.76 25.08,29.65 K2.4 | v19.53,31.23 18.1,31.23 U5.1 | C8.2 20.48,22.98 19.53,23.93 v19.53,25.77 v19.53,27.81 v19.53,31.23 | 24.37,41.32 23.65,42.03 21.08,42.03 20.32,41.27 v20.32,38.73 20.32,36.47 | 20.32,36.47 v20.32,33.65 20.32,32.03 v19.53,31.23 | 11.59,14.09 v11.59,12.03 | 31.35,40.68 v31.91,41.24 | 19.05,14.09 18.54,14.09 v18.03,14.6 | 19.05,12.82 18.8,13.07 v18.03,13.07 | 41.91,10.28 40.39,10.28 v39.12,11.55 | C8.2 19.39,21.75 v19.39,21.2 | 49.85,20.69 46.48,20.69 45.59,19.8 | 45.59,19.8 v43.43,17.65 | 45.59,19.8 47.12,19.8 v47.24,19.68 | 60.96,28.69 60.52,28.25 60.52,25.19 60.35,25.03 60.35,24.4 59.18,23.23 59.18,19.12 58.87,18.81 58.87,18.26 59.26,17.87 59.46,17.87 v60.2,17.14 60.45,17.39 v60.45,19.93 | 33.48,16.12 33.48,14.86 33.26,14.65 | v29.46,18.15 31.45,18.15 31.86,17.74 31.86,16.98 32.26,16.58 33.02,16.58 33.48,16.12 | 26.51,43.46 22.51,43.46 v22.35,43.3 | 60.96,28.69 60.89,28.69 60.51,28.32 59.88,28.32 59.5,28.69 T1.PAD
  pour Bottom: 38.86,31.11 39.88,32.12 44.7,32.12 45.47,31.36 45.47,22.22 44.7,21.46 39.88,21.46 38.86,22.47
  pour Top: 18.8,44.32 18.8,34.79 4.06,34.79 4.06,43.68 0,41.27 0,11.04 19.05,-0.01 31.75,-0.01 31.75,18.41 30.99,19.17 23.37,26.79 23.37,27.04 30.99,34.66 30.99,44.44 18.8,44.44
  pour Top: 31.75,0.12 44.45,0.12 63.37,11.04 63.37,41.27 58.04,44.32 31.75,44.44 31.75,33.9 36.58,29.08 38.48,30.98 38.48,31.62 39.88,33.01 44.7,33.01 46.1,31.62 46.1,22.22 44.83,20.95 39.62,20.95 38.35,22.22 38.35,24.12 37.21,25.27 30.99,19.17
HPGND  (via drill 0.15, 0.2)
  Top 0.152: v25.4,12.03 25.72,11.71 32.54,11.71 34.67,13.84 v34.8,13.84 | v15.24,27.42 17.3,27.42 19.53,29.65 J6.EARTH | v15.24,23.46 19.21,19.49 v23.81,19.49 | J3.2 40.64,5.2 30.99,5.2 30.72,4.93 22.62,4.93 22.61,4.95 J2.1
  Bottom 0.152: J2.1 22.86,5.2 22.86,9.49 v25.4,12.03 25.4,12.82 23.81,14.41 v23.81,19.49 | U3.4 33.34,12.18 34.21,13.05 34.21,13.21 34.8,13.8 v34.8,13.84 | v15.24,23.46 v15.24,27.42
HPL  (via drill 0.15)
  Top 0.152: v35.24,12.18 34.45,11.39 18.57,11.39 v18.26,11.71 18.1,11.71 v15.88,13.93 | v15.88,31.87 21.59,31.87 22.07,31.39 25.56,31.39 26.04,30.92 J6.TIP
  Bottom 0.152: v35.24,12.18 34.77,12.18 34.13,11.55 U3.6 | v18.26,11.71 17.78,11.23 17.78,5.2 J2.2 | v15.88,31.87 14.61,30.6 14.61,17.9 16.19,16.31 16.19,14.25 v15.88,13.93
HPR  (via drill 0.15)
  Top 0.152: v43.97,13.61 43.94,13.61 43.29,14.26 37.17,14.26 36.83,14.6 33.78,14.6 33.18,13.99 v33.18,13.61 | v54.45,29.01 54.45,30.44 53.34,31.55 51.04,31.55 49.63,32.96 41.75,32.96 41.75,35.04 40.48,36.31 36.04,36.31 35.4,36.95 32.7,36.95 32.7,33.62 31.59,32.5 28.42,32.5 26.19,34.73 J6.RING1
  Bottom 0.152: v33.18,13.61 33.18,13.45 32.7,12.98 U3.2 | v43.97,13.61 45.72,11.87 45.72,7.74 | 45.72,7.74 45.72,5.2 J3.1 | 59.23,11.93 | 45.72,7.74 55.56,7.74 59.23,11.41 59.23,11.93 | 59.23,11.93 59.23,17.32 58.46,18.09 58.46,18.98 58.78,19.29 58.78,23.68 59.08,23.98 59.08,24.52 58.69,24.91 57.43,24.91 54.84,27.5 54.84,28.62 v54.45,29.01
ID  (via drill 0.15)
  Top 0.152: v36.04,32.98 37.31,32.98 37.78,33.46 37.78,34.57 X1.4 | v47.62,22.34 48.26,21.71 53.18,21.71 54.13,20.76 v54.93,20.76 | v46.36,39.49 44.13,41.71 41.75,41.71 38.26,38.22 v37.78,38.22
  Bottom 0.152: K2.23 34.77,31.71 v36.04,32.98 36.83,33.77 36.83,35.84 37.62,36.63 37.62,38.06 v37.78,38.22 | v54.93,20.76 54.93,18.85 54.61,18.53 K1.10 | v47.62,22.34 46.89,23.08 46.89,35.4 46.36,35.94 v46.36,39.49
LIL
  Bottom 0.152: J2.4 20.32,5.2 20.32,3.42 21.08,2.66 22.07,2.66 22.7,3.29 24.13,3.29 C18.2
LIL_ISO  (via drill 0.15, 0.2)
  Top 0.152: v24.13,6.72 24.46,7.05 26.21,7.05 26.92,6.34 27.44,6.34 28.12,7.03 33.26,7.03 v33.5,7.26
  Bottom 0.152: v33.5,7.26 33.5,7.42 33.02,7.9 U3.14 | v24.13,6.72 C18.1
LIR
  Bottom 0.152: J3.3 43.18,5.2 43.18,3.42 42.26,2.5 37.47,2.5 36.67,3.29 C14.2
LIR_ISO
  Bottom 0.152: U3.13 33.34,8.37 34.22,7.5 34.22,6.48 34.56,6.14 35.57,6.14 36.51,5.2 36.51,5.04 C14.1
LOL
  Bottom 0.152: J2.6 18.89,9.17 18.89,12.06 18.61,12.34 17.94,12.34 17.46,11.87 17.46,3.42 18.54,2.34 24.61,2.34 25.56,3.29 C17.2
LOL_ISO  (via drill 0.2)
  Top 0.152: v25.65,6.47 26.36,6.47 26.79,6.04 27.57,6.04 28.23,6.7 33.73,6.7 33.75,6.72 v34.8,6.72
  Bottom 0.152: U3.12 33.66,8.69 34.96,7.39 34.96,6.88 v34.8,6.72 | C17.1 v25.65,6.47
LOR
  Bottom 0.152: J3.5 44.45,7.74 40.32,7.74 38.89,6.31 38.89,4.25 38.1,3.45 C13.2
LOR_ISO
  Bottom 0.152: C13.1 38.1,5.96 37.91,6.15 36.99,6.15 34.13,9.01 U3.11
MIC
  Bottom 0.152: 33.81,3.61 33.97,3.45 34.92,3.45 C16.1 | 33.81,3.61 32.23,5.2 31.27,5.2 29.53,3.45 28.73,3.45 R13.1 | 33.81,3.61 31.75,1.55 J5.2
MIC_BIAS
  Bottom 0.152: C12.1 27.3,5.04 28.57,5.04 R13.2 28.73,5.04 28.73,5.71 29.13,6.1 30.72,6.1 30.86,5.96 32,5.96 32.51,6.47 32.51,7.04 U3.16
N$1
  Bottom 0.152: 39.69,42.79 39.69,42.98 U2.3 | 48.1,34.66 48.1,36.47 J7.2
  Bottom 0.254: C20.2 48.1,33.16 48.1,34.66 | J7.2 47.94,36.63 47.94,43.55 47.77,43.73 47.75,43.73 47.67,43.81 43.94,43.81 43.64,43.51 43.64,42.66 R18.2 41.66,42.79 39.69,42.79
N$2  (via drill 0.15)
  Top 0.152: v36.2,38.85 38.58,41.24 40.8,41.24 41.59,42.03 46.04,42.03 v48.89,39.17 | v49.05,29.01 52.23,25.84 v53.98,25.84
  Bottom 0.152: v36.2,38.85 35.24,37.9 35.24,32.82 34.45,32.03 K2.22 | v48.89,39.17 49.05,39.01 v49.05,29.01 | K1.16 58.1,15.04 58.26,15.2 58.26,17.43 57.86,17.84 57.86,19.23 58.17,19.54 58.17,20.63 57.58,21.21 57.58,22.23 v53.98,25.84
N$3  (via drill 0.15, 0.2, 0.35)
  Top 0.152: v58.17,21.46 56.9,20.19 53.23,20.19 53.06,20.35 52.35,20.35 52.18,20.19 v51.56,20.19 | v45.72,34.92 60.45,34.92 v61.21,35.68 | v60.2,29.08 60.2,26.67 58.42,24.89 v58.42,24.25
  Bottom 0.152: 50.64,21.87 51.56,20.95 v51.56,20.19 | K2.24 35.08,31.39 35.72,32.03 v35.88,32.03 38.26,34.41 40.54,34.41 40.85,34.09 41.38,34.09 41.68,34.39 45.19,34.39 v45.72,34.92 | 57.94,12.66 K1.17 58.5,12.13 58.75,12.13 58.93,12.31 58.93,17.2 58.16,17.97 58.16,19.1 58.47,19.41 58.47,21.15 v58.17,21.46 58.42,21.71 v58.42,24.25 | v61.21,35.68 61.21,35.12 61.01,34.91 61.01,33.9 61.21,33.7 61.21,33.22 60.55,32.56 60.55,29.43 v60.2,29.08
N$4  (via drill 0.15)
  Top 0.152: v39.53,6.15 v38.73,6.95
  Bottom 0.152: v38.73,6.95 36.83,6.95 34.45,9.33 U3.10 | v39.53,6.15 39.53,5.04 C15.2
N$5
  Bottom 0.152: K2.32 37.94,28.54 37.93,28.54
  Bottom 0.203: K2.32 37.93,28.54 38.8,29.42 C3.1 39.84,29.2 G1.1 | K2.32
N$6
  Bottom 0.203: G1.2 42.46,24.16 C4.1 39.06,24.16 K2.33
N$7
  Bottom 0.152: 28.26,38.7 28.89,38.06 29.21,38.06 C5.1 | 28.26,38.7 27.46,39.49 R11.2 | K2.14 28.73,33.14 28.14,33.73 28.14,34.28 | 28.14,34.28 | 28.26,38.7 28.14,38.58 28.14,34.28
N$8
  Bottom 0.152: C22.1 22.23,16.63 22.38,16.47 22.38,15.04 U4.4
N$9
  Bottom 0.152: U3.26 29.05,11.23 27.46,12.82 27.46,15.36 SJ1.1
N$10  (via drill 0.15)
  Top 0.152: v24.45,32.03 27.15,32.03 28.73,30.44 31.91,30.44 32.7,31.23 R7.2
  Bottom 0.152: v24.45,32.03 24.77,31.71 24.77,30.76 25.56,29.96 K2.5
N$11
  Bottom 0.152: C6.1 32.38,38.06 32.38,33.77 K2.17
N$12  (via drill 0.15)
  Top 0.152: v23.65,13.77 v30.48,13.77
  Bottom 0.152: v30.48,13.77 30.16,13.45 30.16,12.98 30.48,12.66 U3.30 | v23.65,13.77 22.54,13.77 22.54,13.3 U4.5 22.38,13.14 22.38,11.55 22.23,11.39 C23.2
N$13
  Bottom 0.152: U3.25 28.73,10.76 24.92,14.57 24.92,15.36 SJ2.1
N$14  (via drill 0.2)
  Top 0.152: v21.84,28.06 31.11,28.06 R8.2
  Bottom 0.152: K2.6 25.88,30.28 25.08,31.08 25.08,32.38 24.8,32.66 24.29,32.66 23.77,32.14 23.77,31.98 22.35,30.57 22.35,29.68 22.47,29.56 22.47,29.1 21.84,28.48 v21.84,28.06
N$15
  Bottom 0.152: U3.15 32.7,7.58 32.86,7.42 32.86,7.1 34.92,5.04 C16.2
N$16  (via drill 0.15)
  Top 0.152: P3.+ 30.96,35.68 30.96,36.63 30.05,37.54 30.05,38.52 29.72,38.85 23.65,38.85 21.43,36.63 20,36.63 18.74,35.37 18.74,34.94 18.71,34.94 18.48,34.71 5.86,34.71 v5.56,34.41
  Bottom 0.152: v5.56,34.41 5.87,34.09 5.87,29.65 6.83,28.69 6.83,26.63 5.56,25.36 4.92,25.36 U5.19
N$17
  Bottom 0.152: C7.1 25.88,40.92 25.88,39.49 R11.1 26.04,39.49 26.04,36.31 R12.1 26.19,34.89 28.26,32.82 K2.13
N$52  (via drill 0.15)
  Top 0.152: v27.3,42.51 26.04,41.24 v23.34,41.24 | v21.91,35.36 22.23,35.68 27.46,35.68 29.21,33.93 P1.-
  Bottom 0.152: v27.3,42.51 29.21,42.51 R1.2 | v23.34,41.24 21.91,39.81 v21.91,35.36
N$68  (via drill 0.15)
  Top 0.152: v58.74,42.03 56.99,43.78 v36.2,43.78
  Bottom 0.152: K2.21 33.97,32.35 34.29,32.66 34.29,35.36 33.81,35.84 C2.1 33.81,36 34.61,36.79 34.61,43.55 34.83,43.78 v36.2,43.78 | v58.74,42.03 58.74,40.92 R5.3
N$70  (via drill 0.15, 0.2)
  Top 0.152: v53.02,30.44 52.93,30.35 51.82,30.35 49.53,32.63 39.88,32.63 38.61,31.36 v37.34,31.36
  Bottom 0.152: v53.02,30.44 53.34,30.12 53.34,24.41 57.78,19.96 57.78,19.59 57.55,19.36 57.55,17.71 57.78,17.48 57.78,15.99 57.47,15.68 K1.15 | K2.25 35.82,31.39 37.31,31.39 v37.34,31.36
N$71  (via drill 0.15)
  Top 0.152: v32.07,43.14 31.75,43.46 30,43.46 29.21,42.66 P5.-
  Bottom 0.152: v32.07,43.14 33.66,43.14 R17.1
N$72
  Bottom 0.152: R15.2 35.4,41.39 35.4,42.98 R17.2 35.4,43.14 37.62,43.14 U2.1
N$73  (via drill 0.15)
  Top 0.152: P2.+ 30.96,38 30.96,38.73 30.35,39.33 24.29,39.33 21.91,41.71 18.99,41.71 18.44,41.17 18.44,35.11 18.35,35.02 4.51,35.02 4.42,35.11 4.42,41.42 v4.13,41.71
  Bottom 0.152: v4.13,41.71 3.65,41.24 3.65,28.54 4.29,27.9 4.76,27.9 U5.21
N$75
  Bottom 0.152: R16.2 37.62,39.49 37.62,40.44 U2.5
N$76  (via drill 0.15)
  Top 0.152: v32.54,40.44 32.38,40.28 31.11,40.28 P4.+
  Bottom 0.152: v32.54,40.44 32.54,41.24 33.66,41.24 R15.1
N$79  (via drill 0.15)
  Top 0.152: v40.32,12.98 v34.77,12.98
  Bottom 0.152: v34.77,12.98 33.66,11.87 U3.5 | v40.32,12.98 41.27,12.98 R20.1 41.27,12.82 41.27,11.39 C21.1
PIO4  (via drill 0.15)
  Top 0.152: v23.02,23.93 20.16,26.79 v6.19,26.79 JP1.1
  Bottom 0.152: v23.02,23.93 23.02,22.03 22.23,21.23 R4.2 | U5.22 4.92,28.85 5.84,28.85 6.19,28.5 v6.19,26.79
PROG  (via drill 0.15)
  Top 0.152: v58.1,11.07 57.94,11.23 39.69,11.23 39.38,10.92 38.85,10.92 38.54,11.23 34.77,11.23 34.61,11.07 16.35,11.07 S1.2 14.76,12.66 8.41,12.66 S1.1
  Bottom 0.152: v58.1,11.07 58.1,11.39 57.47,12.03 K1.18 | J1.4 3.65,19.33 3.65,17.26 8.25,12.66 S1.1
RESET  (via drill 0.15, 0.35)
  Top 0.152: v50.64,21.07 50.32,21.39 45.76,21.39 45.21,20.85 40.39,20.85 39.84,21.39 38.89,21.39 v38.86,21.46 | J1.5 1.43,24.09 15.56,24.09 16.35,23.3 38.1,23.3 v38.42,23.61
  Bottom 0.152: K2.34 38.35,24.15 38.35,23.61 | 38.35,23.61 38.35,21.96 v38.86,21.46 38.89,21.39 39.85,20.44 39.85,17.42 38.73,16.31 38.73,15.04 39.85,15.04 40.64,15.84 42.55,15.84 46.04,12.34 46.04,8.37 46.37,8.04 51,8.04 K1.25 51.59,8.53 | v50.64,21.07 50.64,19.96 51.59,19.01 K1.8 | v38.42,23.61 38.35,23.61
SMIRF_RX  (via drill 0.15)
  Top 0.152: v19.37,18.85 8.25,18.85 7.62,18.22 6.83,18.22 v6.03,17.42
  Bottom 0.152: v19.37,18.85 19.37,18.22 20.48,18.22 R9.2 | v6.03,17.42 4.92,17.42 4.92,18.06 U5.13
SMIRF_TX  (via drill 0.15)
  Top 0.152: v19.37,17.42 19.21,17.58 v6.98,17.58
  Bottom 0.152: v19.37,17.42 21.11,17.42 21.27,17.58 21.27,19.01 20.64,19.65 R6.2 | v6.98,17.58 5.24,19.33 4.92,19.33 U5.14
V_USB  (via drill 0.2)
  Top 0.254: v40.32,42.03 31.59,42.03 31.11,42.51 P5.+ | v41.12,34.73 40.32,34.73 X1.1
  Bottom 0.254: 40.32,40.76 39.69,40.76 39.69,40.6 U2.4 39.53,40.44 39.53,35.36 C19.2 39.53,35.2 39.53,34.82 40.7,34.82 40.79,34.73 v41.12,34.73 | 40.32,40.76 41.75,40.76 R18.1 | 40.32,40.76 v40.32,42.03
VIN  (via drill 0.2)
  Top 0.254: v44.45,37.27 44.77,36.95 v53.02,36.95 J4.10 | v21.59,14.09 23.18,15.68 37.15,15.68 37.47,15.99 39.05,15.99 v39.37,15.68
  Bottom 0.254: T1.1 54.61,36.79 54.29,37.11 C10.1 54.13,37.11 53.02,37.11 v53.02,36.95 | 21.43,14.09 21.43,14.41 20.95,14.88 20.32,14.88 U4.3 | 21.43,14.09 21.43,13.77 21.27,13.61 21.27,13.3 20.32,13.3 U4.1 | R18.3 43.81,41.71 44.45,41.08 v44.45,37.27 46.48,35.23 46.48,22.79 v39.37,15.68 | v21.59,14.09 21.43,14.09
VRTC
  Bottom 0.152: R5.2 57.78,41.87 58.58,42.66 59.18,42.66 62.23,39.62 JP2.1